# Altium PCB PCB3.PcbDoc
Units mm, origin at the board's own origin, x right, y up, seen from the top; angles counter-clockwise.
Board outline 30 x 20 mm, 2 copper layers (Top Layer, Bottom Layer); 17 components, 13 nets, 57 pads, 1 vias.
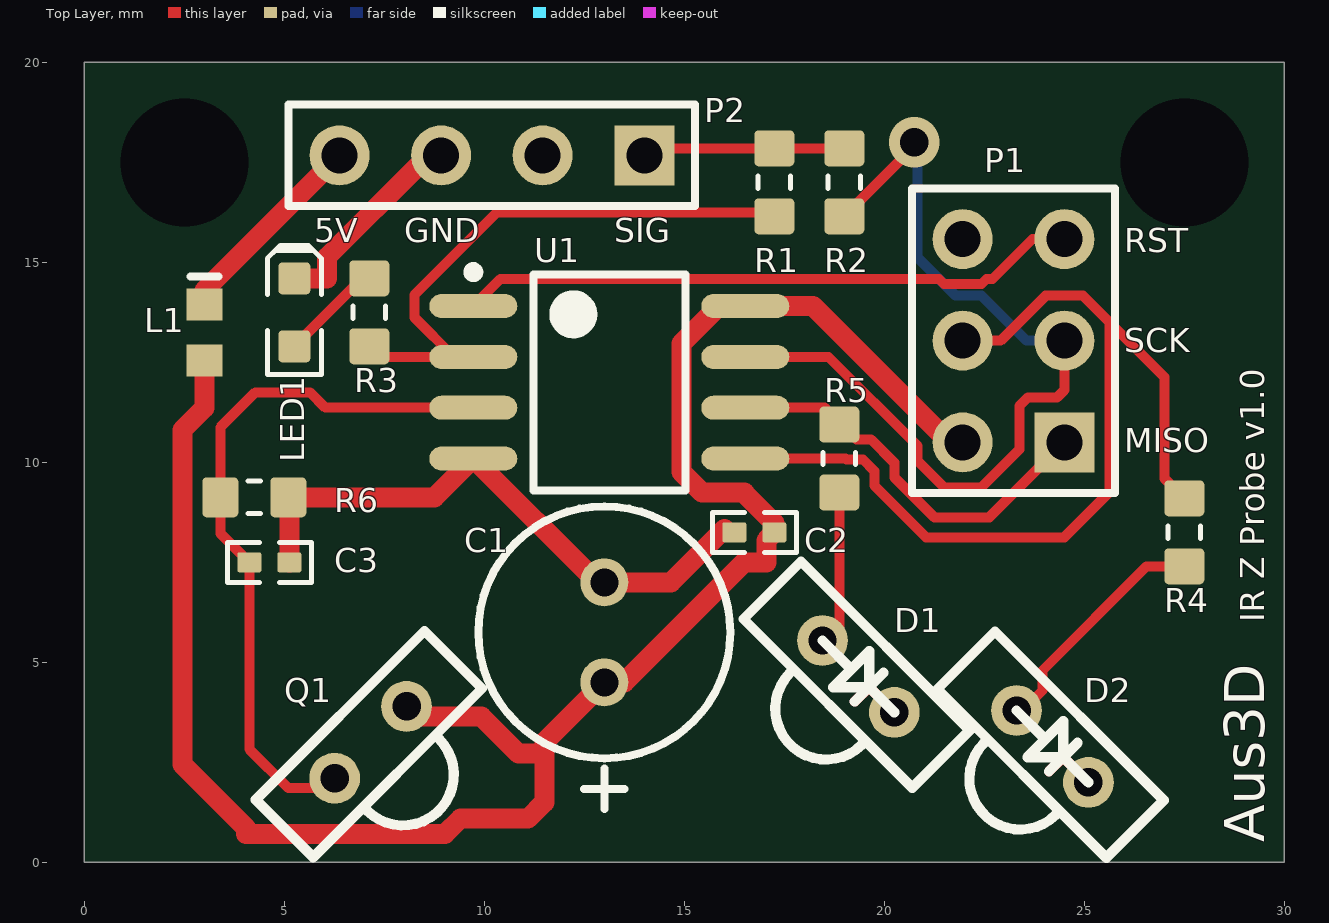
[diagram p0: Top Layer view]
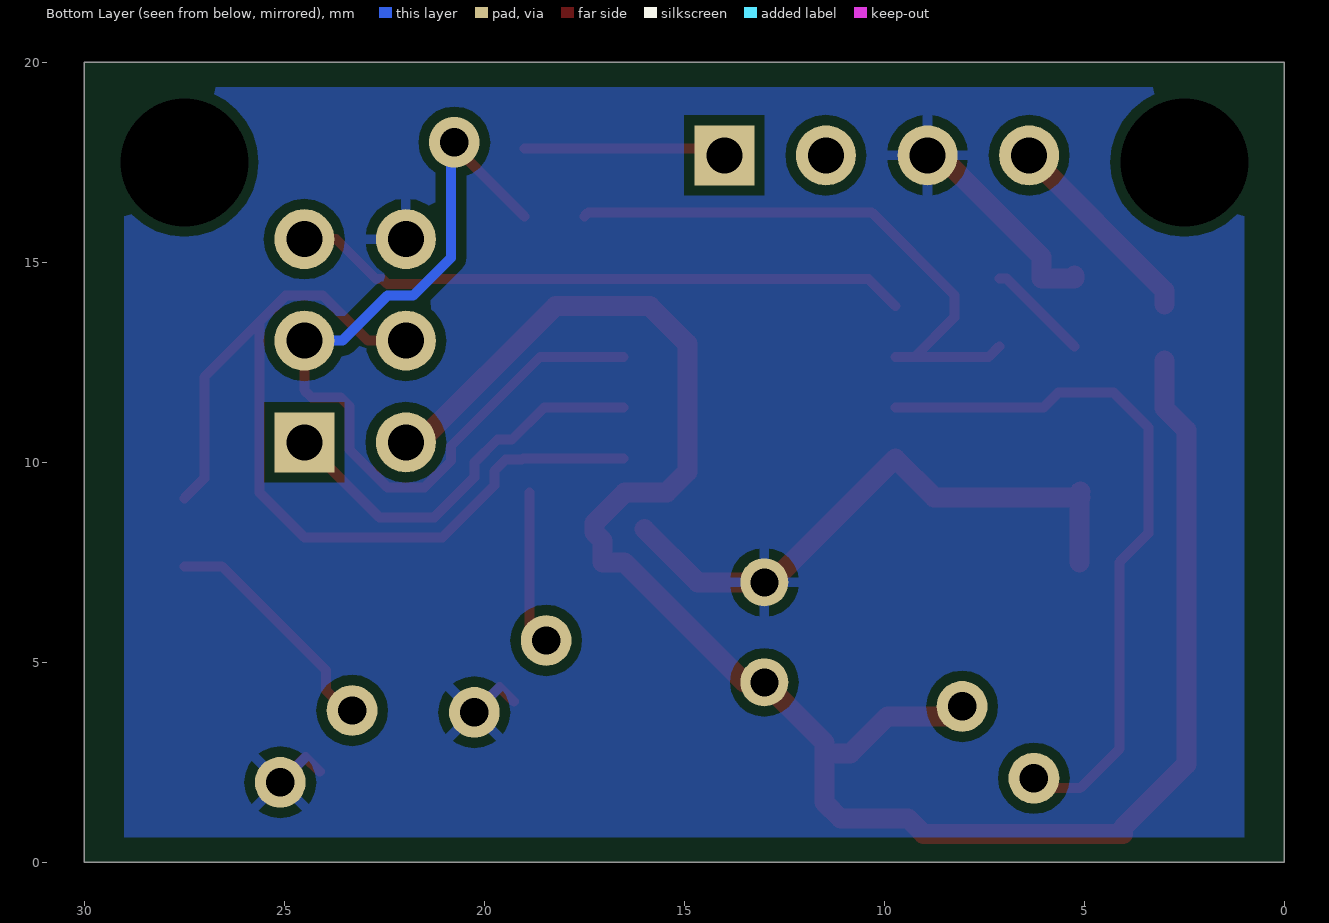
[diagram p1: Bottom Layer view, seen from below]
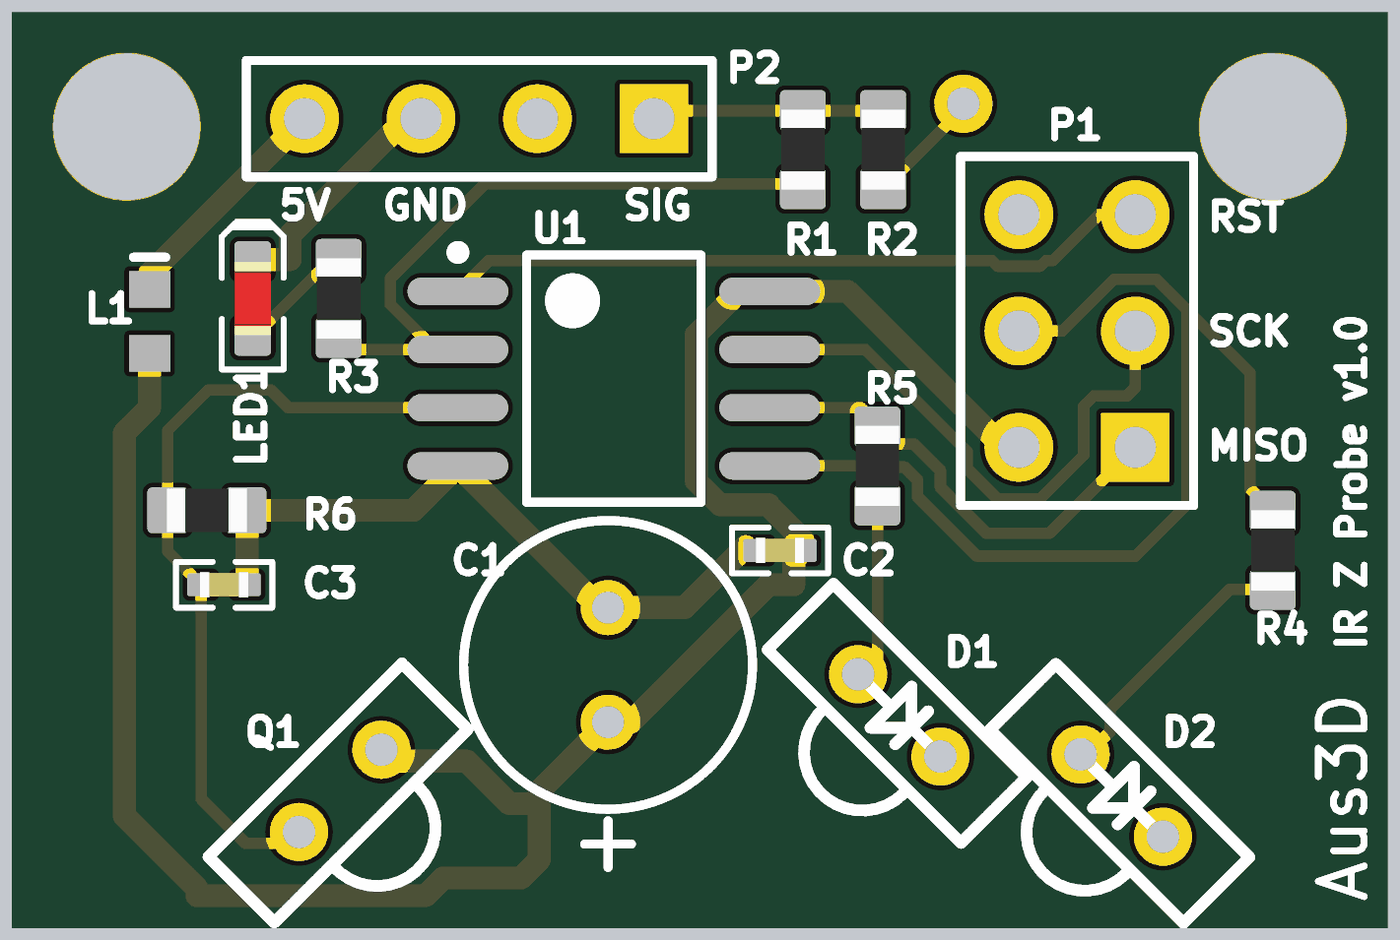
[diagram p2: 3D render of the assembled board from above, using the file's embedded part models]

## Layer stack, top to bottom
Top Solder: solder mask 0.0102, Solder Resist, Dk 3.5
Top Layer: signal copper 0.0356
Dielectric1: dielectric 0.32, FR-4, Dk 4.8
Bottom Layer: signal copper 0.0356
Bottom Solder: solder mask 0.0102, Solder Resist, Dk 3.5

## Board outline
0,0 0,20 30,20 30,0

## Design rules (kind name [scope] priority, off if disabled: settings)
Clearance [All] p1: gap=0.25
FabricationTestPointUsage TestPointUsage [All] p1: valid=0 allowmultiple=FALSE
FabricationTestpoint Testpoint [All] p1: side=3 testpointundercomponent=TRUE minsize=1.016 maxsize=2.54 preferedsize=1.524 minholesize=0 maxholesize=1.016 preferedholesize=0.813 testpointgrid=0.025 allowsidetop=TRUE allowsidebottom=TRUE usegrid=TRUE gridtolerance=0
PolygonConnect [All] p1: connectstyle=Relief reliefconductorwidth=0.254 reliefentries=4 polygonreliefangle="90 Angle" airgapwidth=0.254
RoutingVias [All] p1: holewidth=0.6 width=1 viastyle="Through Hole" minholewidth=0.6 minwidth=1 maxholewidth=0.6 maxwidth=1
SilkToSolderMaskClearance SilkscreenOverComponentPads [IsPad] p1: minsilkscreentomaskgap=0.254 clearancetoexposedcopper=TRUE
SolderMaskExpansion [All] p1: expansion=0.102
Width Width_Power [(InNet('5V') OR InNet('GND') OR InNet('VCC'))] p1: maxlimit=0.5 minlimit=0.25 preferedwidth=0.5 minimp=50.000000 maximp=50.000000 favimp=50.000000
Width [All] p2: maxlimit=0.25 minlimit=0.2 preferedwidth=0.25 minimp=50.000000 maximp=50.000000 favimp=50.000000
27 further rules are at their usual default settings.

## Components (designator, comment, footprint, x,y, rotation, side; value= is the part's Value field where it differs from the comment)
C1 "100µ" 6.3-DIA-CAP 13,7 r270 top
C2 "100n" CAPC1005X55N 16.75,8.25 r0 top
C3 "1n" CAPC1005X55N 4.625,7.5 r0 top
D1 "GL480E" LED-2.54spacing 20.25,3.75 r135 top
D2 "GL480E" LED-2.54spacing 25.102,2 r135 top
L1 "Inductor" INDC1608L 3,13.25 r270 top
LED1 "Red" LED-0603-RED 5.25,13.75 r90 top
P1 "ICSP" HDR2X3 24.5,10.5 r90 top
P2 "Header 4" HDR1X4 14,17.675 r180 top
Q1 "SFH3100F" SFH3100F-footprint 8.056,3.898 r225 top
R1 "Thick Film" RESC1608X55N 17.25,17 r270 top
R2 "Thick Film" RESC1608X55N 19,17 r270 top
R3 "Thick Film" RESC1608X55N 7.125,13.75 r90 top
R4 "Thick Film" RESC1608X55N 27.5,8.25 r90 top
R5 "Thick Film" RESC1608X55N 18.875,10.095 r90 top
R6 "Thick Film" RESC1608X55N 4.25,9.125 r180 top
U1 "ATtiny45-20SH" 8S2_N 13.125,12 r0 top

## Footprints (in the part's own frame and the unit in brackets; to place one, negate y for a bottom-side part, rotate by r counter-clockwise, add the part's x,y. Pads: shape width x height; smd on the part's side, far side on the other; paste and mask are expansions set on the pad)
6.3-DIA-CAP [mm]
  round 1.2 hole 0.7: 1(2.5,0) 2(0,0)
  silkscreen extent -1.9,-3.15 5.67,3.15
8S2_N [mm] "SOP, 8-Leads, Body 5.3x5.3mm, Pitch 1.27mm, IPC Medium Density"
  oval 2.2x0.6 smd: 1(-3.4,1.905) 2(-3.4,0.635) 3(-3.4,-0.635) 4(-3.4,-1.905) 5(3.4,-1.905) 6(3.4,-0.635) 7(3.4,0.635) 8(3.4,1.905)
  silkscreen extent -3.52,-2.7 1.9,2.88, body extent -2.7,-2.68 2.7,2.68, height 2.16
CAPC1005X55N [mm] "Chip Capacitor, Body 1.0x0.5mm, EIA 0402, IPC Medium Density"
  round 0.2 on Mech15: 0(0,0)
  rrect20% 0.6x0.5 smd: 1(-0.5,0) 2(0.5,0)
  Top Layer pour cut-out: -0.325,0.375 -0.2,0.5 0.2,0.5 0.325,0.375 0.325,-0.375 0.2,-0.5 -0.2,-0.5 -0.325,-0.375
  silkscreen extent -1.05,-0.5 1.05,0.5, body extent -0.52,-0.27 0.53,0.28, height 0.55
HDR1X4 [mm] "Connector; Header; 4 Position"
  rect 1.5x1.5 hole 0.9: 1(0,0)
  round 1.5 hole 0.9: 2(2.54,0) 3(5.08,0) 4(7.62,0)
  silkscreen extent -1.27,-1.27 8.89,1.27
HDR2X3 [mm] "Connector; Header; 3x2 Position"
  rect 1.5x1.5 hole 0.9: 1(0,0)
  round 1.5 hole 0.9: 2(0,2.54) 3(2.54,0) 4(2.54,2.54) 5(5.08,0) 6(5.08,2.54)
  silkscreen extent -1.27,-1.27 6.35,3.81
INDC1608L [mm] "Chip Inductor, Body 1.6x0.8mm, IPC High Density"
  rect 0.8x0.9 smd: 1(-0.7,0) 2(0.7,0)
  silkscreen extent -1.4,-0.35 -1.4,0.35, body extent -0.87,-0.48 0.87,0.48, height 0.55
LED-2.54spacing [mil]
  round 50 hole 28: 1(0,0) 2(100,0)
  Top Layer lines w10: 35,20 35,0 0,0
  silkscreen extent -65,-40 170,95
LED-0603-RED [mm]
  round 0.254 on Mech15: 0(0,0)
  rrect25% 0.8x0.8 smd: A(-0.85,0) K(0.85,0)
  Top Layer pour cut-out: -0.5,0.5 0.5,0.5 0.5,-0.5 -0.5,-0.5
  silkscreen extent -1.55,-0.67 1.68,0.67, body extent -0.8,-0.4 0.8,0.4, height 0.75
RESC1608X55N [mm] "Chip Resistor, Body 1.6x0.8mm, EIA 0603, IPC Medium Density"
  round 0.254 on Mech15: 0(0,0)
  rrect25% 0.9x1 smd: 1(-0.85,0) 2(0.85,0)
  Top Layer pour cut-out: -0.6,0.5 -0.4,0.7 0.4,0.7 0.6,0.5 0.6,-0.5 0.4,-0.7 -0.4,-0.7 -0.6,-0.5
  silkscreen extent -0.15,-0.41 0.15,0.41, body extent -0.87,-0.47 0.88,0.48, height 0.54
SFH3100F-footprint [mil]
  round 50 hole 28: 1(0,0) 2(100,0)
  silkscreen extent -65,-40 170,95

## Part data
C1: library part CAPE_100u_16V_THD, "Capacitor THD Electrolytic 100uF 20% 16V Radial"
C2: library part CAPC_100n_0402_X5R_16V_10%, "Capacitor SMD Cer 100nF 10% 16V X5R 0402"
C3: library part CAPC_1n_0402_X7R_16V_10%, "Capacitor SMD Cer 1nF 10% 16V X7R 0402"
LED1: library part LED_SMD_Red_0603_220mcd, "LED 0603 SMD Hyper Red 630nm 220mcd 20mA"
P1: library part "Header 3X2", "Header, 3-Pin, Dual row"
P2: "Header, 4-Pin"
Q1: "GL480E"
R1 R2 R4 R5 R6: library part RES_2K2_0603_5%, "Resistor SMD chip 2.2k Ohm 0.1W 5% 0603"
R3: library part RES_330R_0603_5%, "Resistor SMD chip 330 Ohm 0.1W 5% 0603"
U1: "8-bit AVR Microcontroller, 20MHz, 2.7-5.5V, 4K Flash, 256 Bytes EEPROM, 256 Bytes SRAM, Industrial Grade (-40°C to 85°C), 8-Lead SOIC, Pb-Free"

## Free pads (board coordinates)
  round 1.524 hole 3.2: 2(2.5,17.5) 2(27.5,17.5)

## Via types
v1: diameter 1.27, hole 0.711, Top Layer to Bottom Layer, 1 vias

## Nets (pads, with @x,y where several pads share a name; then routed paths per layer and width w, separated by ;. In a path a pad name is that pad's centre, name@x,y a point inside that pad or via, vN(x,y) a via of type N, cw(c..) or ccw(c..) an arc to the next point about the centre after c; other vN are vias at no path point)
5V: C1.1 C2.2 L1.2 P1.2 Q1.1 U1.8 | length 49
  Top Layer w0.5: L1.2 3,11.359 2.45,10.809 2.45,2.45 4.037,0.863 4.037,0.713 9.019,0.713 9.403,1.097 11.097,1.097 11.5,1.5 11.5,2.722 ; Q1.1@8.306,3.648 9.924,3.648 10.85,2.722 11.5,2.722 ; P1.2 21.625,10.5 18.22,13.905 U1.8 15.864,13.905 14.925,12.966 14.925,9.764 15.439,9.25 16.5,9.25 16.5,9.228 17.25,8.478 C2.2 17.05,8.05 17.05,7.5 16.5,7.5 13.5,4.5 C1.1 11.5,3 11.5,2.722
GND: C1.2 C2.1 C3.2 D1.1 D2.1 LED1.K P1.6 P2.3 R6.1 U1.4 | length 19.8
  Top Layer w0.5: R6.1@5.1,9.275 R6.1@5.125,9.25 ; C3.2 5.125,9.1 R6.1 8.755,9.125 U1.4 12.82,7 C1.2 14.667,7 C2.1@16,8.333 ; LED1.K@5.25,14.665 LED1.K 6.066,14.6 6.066,15.132 8.434,17.5 P2.3@8.67,17.5
NetC3_1: C3.1 Q1.2 R6.2 U1.3 | length 18
  Top Layer w0.25: Q1.2@6.51,1.852 5.102,1.852 4.125,2.829 C3.1 3.4,8.225 R6.2 3.4,10.875 4.275,11.75 5.639,11.75 6.024,11.365 U1.3
NetD1_2: D1.2 R5.1 | length 4.1
  Top Layer w0.25: D1.2@18.454,5.296 18.875,5.717 R5.1
NetD2_2: D2.2 R4.1 | length 6
  Top Layer w0.25: D2.2@23.306,3.648 23.954,4.296 23.954,4.796 26.558,7.4 R4.1
NetLED1_A: LED1.A R3.2 | length 2.6
  Top Layer w0.25: LED1.A 6.95,14.6 R3.2
NetP1_1: P1.1 R5.2 U1.6 | length 10.1
  Top Layer w0.25: U1.6 18.51,11.365 19.305,10.57 19.672,10.57 20.25,9.992 20.25,9.625 21.25,8.625 22.625,8.625 P1.1
NetP1_3: P1.3 R2.2 U1.7 | length 22.4
  Top Layer w0.25: U1.7 18.606,12.635 20.835,10.406 20.835,10.034 21.494,9.375 22.426,9.375 23.375,10.324 23.375,11.405 23.595,11.625 24.322,11.625 24.5,11.803 P1.3 ; R2.2 20.75,17.9 v1(20.75,18)
  Bottom Layer w0.25: v1(20.75,18) 20.835,17.915 20.835,15.114 21.784,14.165 22.426,14.165 23.551,13.04 P1.3
NetP1_4: P1.4 R4.2 U1.5 | length 24.9
  Top Layer w0.25: U1.5 19.03,10.095 19.055,10.07 19.464,10.07 19.75,9.784 19.75,9.418 21.043,8.125 24.5,8.125 25.625,9.25 25.625,13.506 ; P1.4@21.96,12.625 P1.4 22.909,13.04 24.034,14.165 24.966,14.165 25.625,13.506 ; R4.2 27,9.6 27,12.131 25.625,13.506
NetP1_5: P1.5 U1.1 | length 15.6
  Top Layer w0.25: U1.1 10.4,14.58 21.369,14.58 21.494,14.455 22.426,14.455 22.551,14.58 22.705,14.58 23.705,15.58 P1.5
NetR1_2: R1.2 R3.1 U1.2 | length 14.8
  Top Layer w0.25: R3.1 7.39,12.635 U1.2@9.24,12.635 ; U1.2 U1.2@9.24,12.635 ; R1.2@17.5,16.15 17.4,16.25 10.315,16.25 8.25,14.185 8.25,13.625 U1.2@9.24,12.635
SIG: P2.1 R1.1 R2.1 | length 5.5
  Top Layer w0.25: P2.1@13.75,17.5 13.75,17.675 P2.1 14.175,17.85 17.5,17.85 R2.1
VCC: L1.1 P2.4 | length 5.1
  Top Layer w0.5: L1.1 3,14.295 P2.4
pads on no net: C2.0 C3.0 LED1.0 P2.2 R1.0 R2.0 R3.0 R4.0 R5.0 R6.0

## Polygon pours and split planes (outlines as drawn)
GND on Bottom Layer "GND - BottomLayer" (solid, pour order 0): 1,19.375 29,19.375 29,0.625 1,0.625

## Silkscreen, mask and mechanical layers (free items; w line width, h text height)
Top Overlay:
  text "5V" at 5.75,15.5 h0.6
  text "GND" at 8,15.5 h0.6
  text "SIG" at 13.25,15.5 h0.6
  text "RST" at 26,15.25 h0.6
  text "SCK" at 26,12.75 h0.6
  text "MISO" at 26,10.25 h0.6
  text "IR Z Probe v1.0" at 29.5,6 h0.6 r90
  text "Aus3D" at 29.5,0.5 h1 r90
Mechanical 1:
  the board outline again, w0.254
Mechanical 16:
  drawing of 1874 lines, arcs and shapes, not listed
  text "1" at -98.129,99.611 h0.6
  text "2" at -25.485,99.611 h0.6
  text "3" at 47.667,99.611 h0.6
  text "4" at 120.565,99.611 h0.6
  text "A" at -132.47,76.599 h0.6
  text "A" at 154.55,76.599 h0.6
  text "B" at -132.47,28.542 h0.6
  text "B" at 154.55,28.542 h0.6
  text "C" at -132.47,-19.972 h0.6
  text "C" at 154.55,-19.972 h0.6
  text "ENGINEER:" at 39.615,-56.98 h0.6
  text "TITLE:" at 77.715,-56.98 h0.6
  text "PCB DESIGNER:" at 39.615,-64.473 h0.6
  text "D" at -132.47,-67.978 h0.6
  text "D" at 154.55,-67.978 h0.6
  text "DATE:" at 39.615,-72.22 h0.6
  text "PART NO.:" at 77.715,-72.22 h0.6
  text "REV:" at 131.055,-72.22 h0.6
  text "Altium Limited" at 6.595,-74.76 h0.6
  text ".PRINT_DATE" at 40.885,-75.268 h0.6
  text "12a Rodborough Rd" at 6.595,-77.3 h0.6
  text "Frenchs Forest" at 6.595,-79.84 h0.6
  text "FILE NAME:" at 39.615,-79.84 h0.6
  text "DWG NO:" at 77.715,-79.84 h0.6
  text "SCALE:" at 131.055,-79.84 h0.6
  text "NSW 2086" at 6.595,-82.38 h0.6
  text ".PCB_FILE_NAME_NO_PATH" at 40.885,-82.888 h0.6
  text "1" at -98.129,-88.349 h0.6
  text "2" at -25.485,-88.349 h0.6
  text "3" at 47.667,-88.349 h0.6
  text "4" at 120.565,-88.349 h0.6